# Altium PCB enviromentstation.PcbDoc
Units mil, origin at the board's own origin, x right, y up, seen from the top; angles counter-clockwise.
Board outline 2870.03 x 2225.03 mil, 2 copper layers (Top Layer, Bottom Layer); 60 components, 34 nets, 206 pads, 27 vias.
Unrouted connection lines stored in the file: 4.
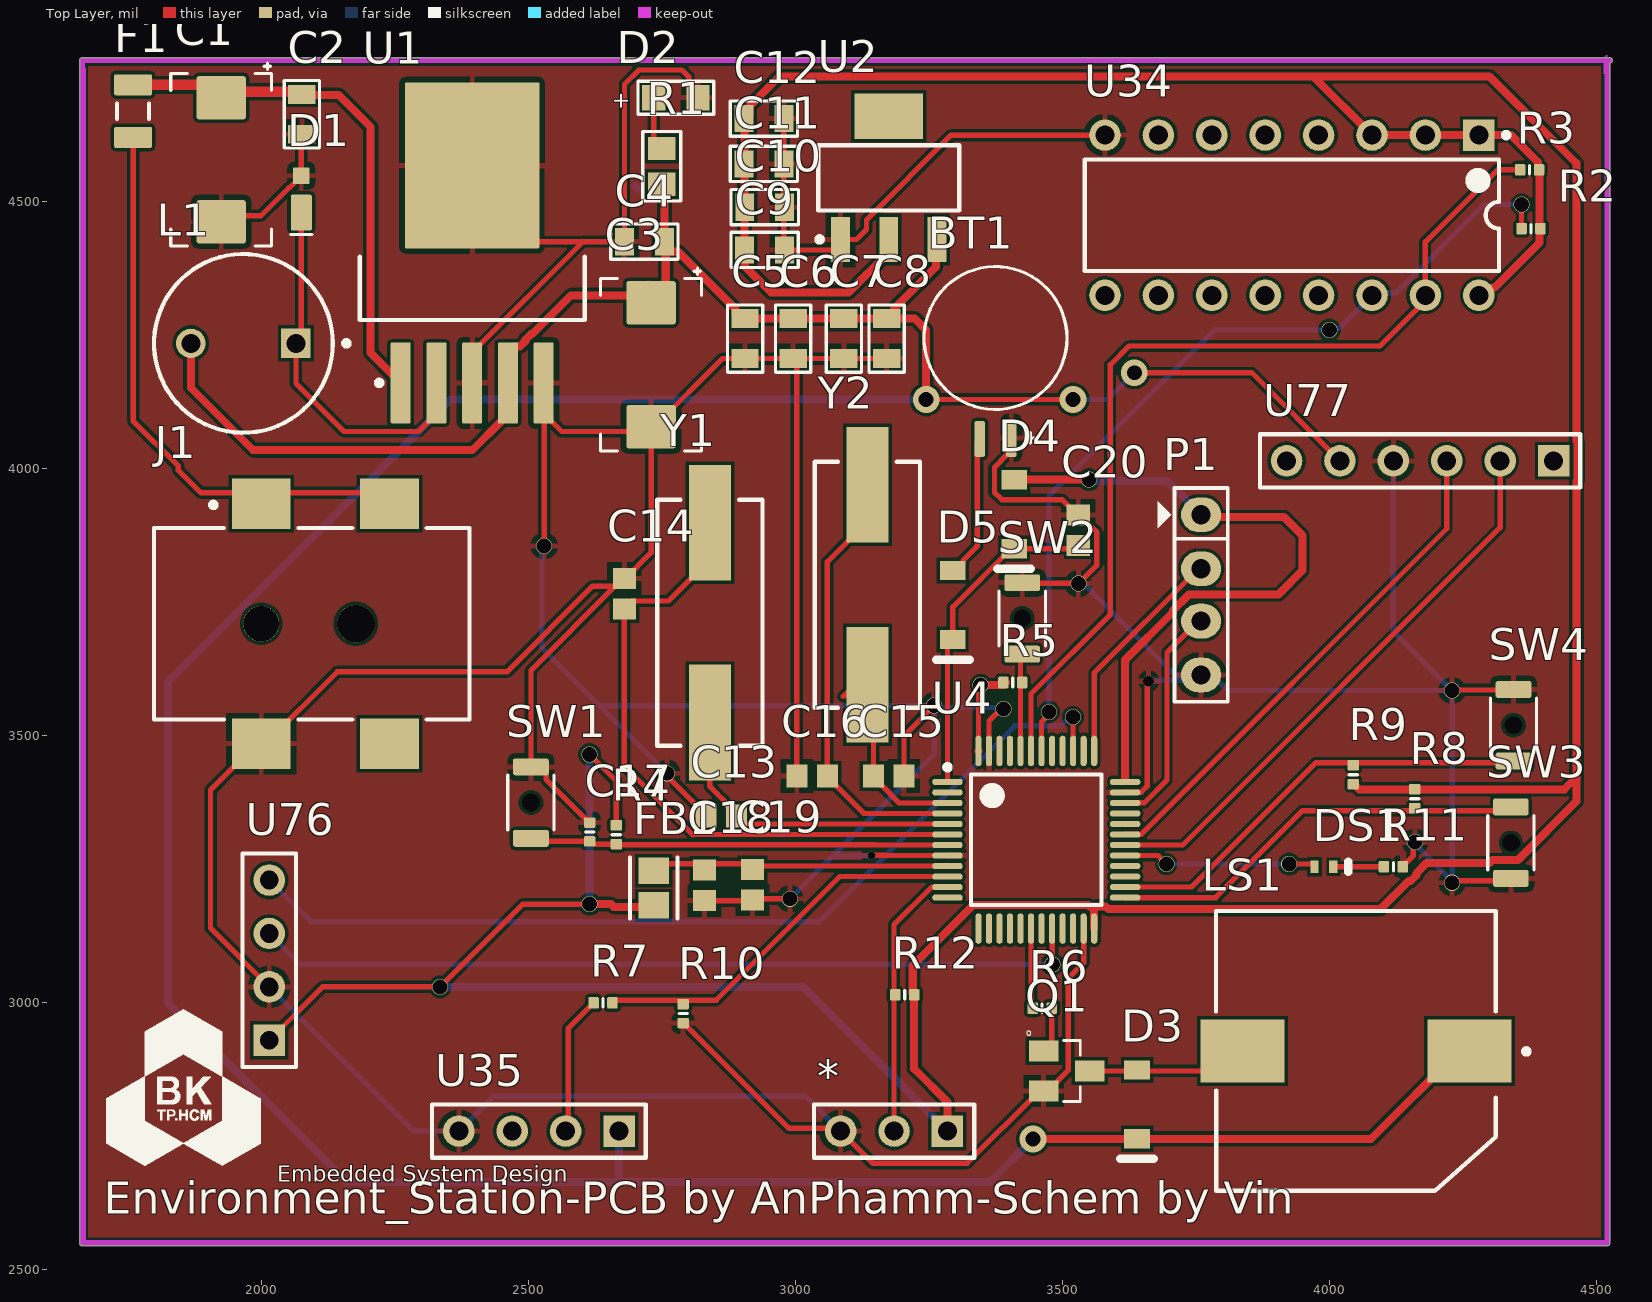
[diagram p0: Top Layer view]
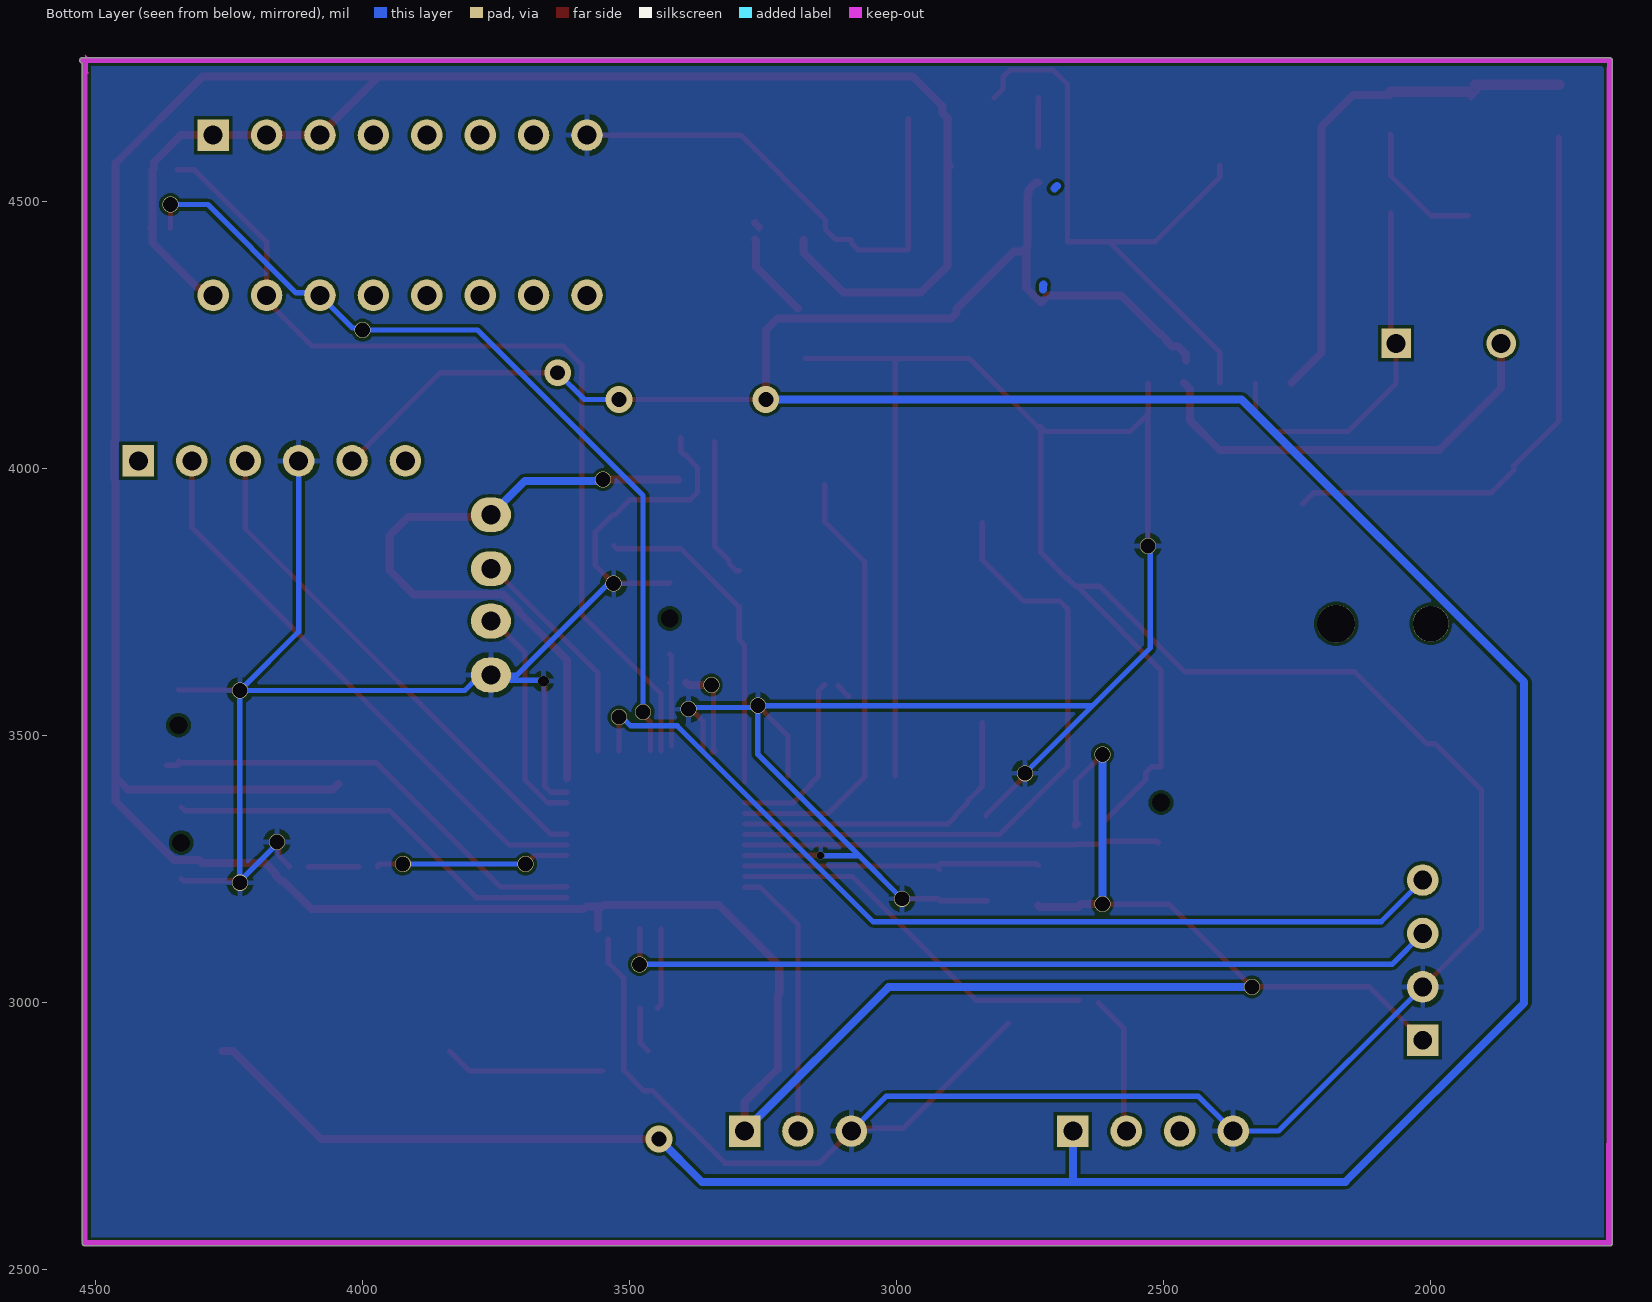
[diagram p1: Bottom Layer view, seen from below]
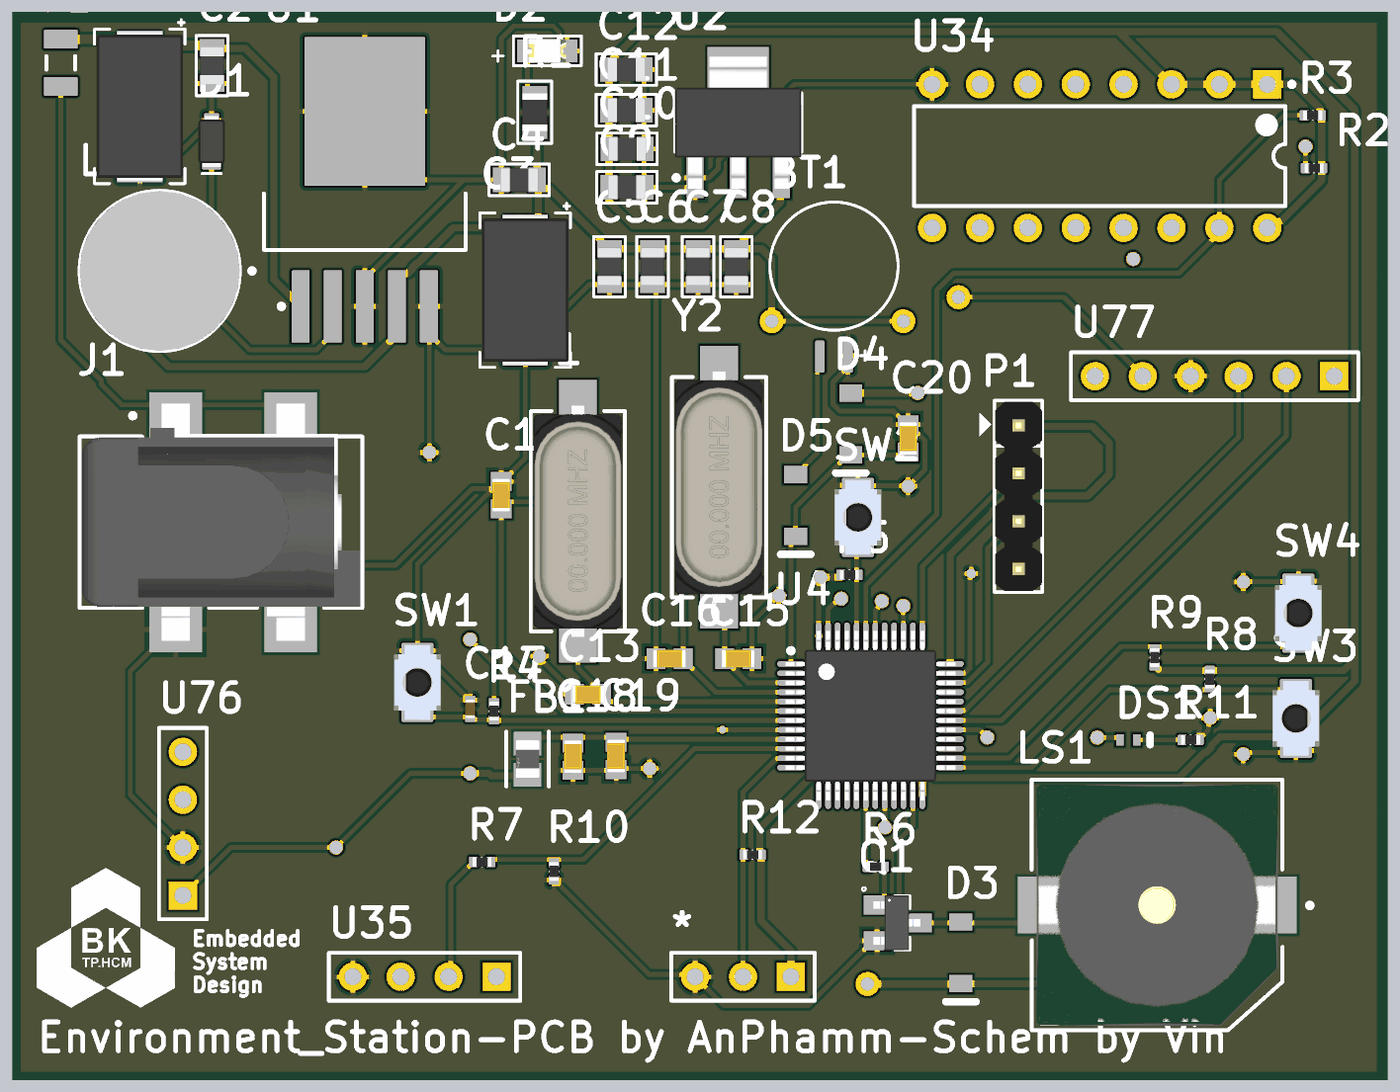
[diagram p2: 3D render of the assembled board from above, using the file's embedded part models]

## Layer stack, top to bottom
Top Solder: solder mask 0.4, Solder Resist, Dk 3.5
Top Layer: signal copper 1.4
Dielectric 1: dielectric 12.6, FR-4, Dk 4.8
Bottom Layer: signal copper 1.4
Bottom Solder: solder mask 0.4, Solder Resist, Dk 3.5

## Board outline
1659.98,2550 1659.98,4765 cw(c1665,4765) 1665,4770.02 4525,4770.02 cw(c4525,4765) 4530.02,4765 cw(c4525,4765) 4525.02,4759.98 4525.02,2550 cw(c4520,2550) 4520,2544.99 1665,2544.99 cw(c1665,2550)
cut-out: 4515,4740 4515,4770 4520,4775
cut-out: 1665,4755 1670,4750 1670,2555 4525,2555 4525,4765 4525,2555 1670,2555

## Design rules (kind name [scope] priority, off if disabled: settings)
Clearance [All] p1: gap=6 ignorepadtopadclearanceinfootprint=FALSE
PolygonConnect [All] p1: connectstyle=Relief reliefconductorwidth=10 reliefentries=4 polygonreliefangle="90 Angle" airgapwidth=10
RoutingVias [All] p1: holewidth=28 width=50 viastyle="Through Hole" minholewidth=28 minwidth=50 maxholewidth=28 maxwidth=50
SolderMaskExpansion [All] p1: expansion=4 istentingtop=FALSE
Width [All] p1: maxlimit=10 minlimit=10 preferedwidth=10
30 further rules are at their usual default settings.

## Components (designator, comment, footprint, x,y, rotation, side; value= is the part's Value field where it differs from the comment)
* "DHT11" HDR1X3 3285,2760 r180 top
BT1 "+3.3V" SEIK-MS621FE-FL11E-2_V 3375,4245 r270 top
C1 "Capacitor 330µF +/-20% 6.3V D3" PNSC-6TPF220M5L 1925,4578.86 r270 top value=330µF
C2 "1 uF, 16 VDC" CAP_0805 2075,4665 r90 top
C3 "Capacitor 330µF +/-20% 6.3V D3" PNSC-6TPF220M5L 2730,4195 r270 top value=330µF
C4 "1 uF, 16 VDC" CAP_0805 2718.64,4426.36 r0 top
C5 "4.7 uF, 25 VDC" CAP_0805 2905,4245 r90 top
C6 "2.2 uF, 35 VDC" CAP_0805 2995,4245 r90 top
C7 "1 uF, 25 VDC" CAP_0805 3090,4245 r90 top
C8 "100 nF, 50 VDC" CAP_0805 3170,4245 r90 top value="0.1 nF, 50 VDC"
C9 "4.7 uF, 25 VDC" CAP_0805 2941.6,4409 r180 top
C10 "2.2 uF, 35 VDC" CAP_0805 2941.8,4489 r180 top
C11 "1 uF, 25 VDC" CAP_0805 2940.2,4570 r180 top
C12 "100 nF, 50 VDC" CAP_0805 2940.2,4655 r180 top value="0.1 nF, 50 VDC"
C13 "Capacitor 1uF +/- 10% 16V 0603" CAPC1608X90X35ML15T15 2861.46,3350 r0 top value=12pF
C14 "Capacitor 1uF +/- 10% 16V 0603" CAPC1608X90X35ML15T15 2680,3766.46 r270 top value=12pF
C15 "Capacitor 1uF +/- 10% 16V 0603" CAPC1608X90X35ML15T15 3175,3425 r180 top value=10pF
C16 "Capacitor 1uF +/- 10% 16V 0603" CAPC1608X90X35ML15T15 3031.46,3425 r0 top value=10pF
C17 "Capacitor 100nF +/-20% 10V 0402" CAPC0402(1005)60_L 2615,3320 r270 top value=100nF
C18 "Capacitor 1uF +/- 10% 16V 0603" CAPC1608X90X35ML15T15 2830,3220 r90 top value=100nF
C19 "Capacitor 1uF +/- 10% 16V 0603" CAPC1608X90X35ML15T15 2920,3221.46 r90 top value=1µF
C20 "Capacitor 1uF +/- 10% 16V 0603" CAPC1608X90X35ML15T15 3530,3885 r270 top value=0.1uF
D1 "MSS1P4-M3/89A" "MicroSMP (DO-219AD)" 2075,4505.59 r90 top
D2 "Green, 3.2V" WL-SMCW_0805 2776.34,4695 r180 top
D3 "B5819W" MCC-SOD123_V 3640,2810 r270 top
D4 "B5819W" MCC-SOD123_V 3410,3915 r270 top
D5 "B5819W" MCC-SOD123_V 3295,3745 r270 top
DS1 "LED RED" EVRL-0402-2_V 3990,3255 r0 top
F1 "FUSE-7A/24V-6" LFUS-466_V 1760,4670 r90 top
FB1 "600Ω @100MHz" FP-BLM21-0_2-t0_85-e0_5-IPC_B 2735,3215 r270 top
J1 "PJ-002BH-SMT-TR" FP-PJ-002BH-SMT-TR-MFG 2094.49,3710 r0 top
L1 "RL622-101K-RC" INDR62-500-1100X850X1100 1966.57,4235 r180 top value=100µH
LS1 "Buzzer" FP-CT-1205CL-SMT-TR-MFG 4050,2910 r0 top
P1 "STLINK Header" JP4 3760,3814 r270 top
Q1 "MMBT2222A" MMBT-SOT23 3508.31,2872.6 r270 top
R1 "10 KOhm, 1/8 W" RESISTOR_0805 2750,4566.54 r270 top
R2 "10KR2F" RESC0402(1005)_L 4377.72,4450 r0 top value=4.7k
R3 "10KR2F" RESC0402(1005)_L 4375,4560 r0 top value=4.7k
R4 "10KR2F" RESC0402(1005)_L 2665,3315 r90 top value=10k
R5 "10KR2F" RESC0402(1005)_L 3407.28,3600 r180 top value=10k
R6 "10KR2F" RESC0402(1005)_L 3462.28,2990 r180 top value=1k
R7 "10KR2F" RESC0402(1005)_L 2640,3000 r180 top value=10k
R8 "10KR2F" RESC0402(1005)_L 4160,3382.28 r90 top value=10k
R9 "10KR2F" RESC0402(1005)_L 4045,3427.28 r270 top value=10k
R10 "10KR2F" RESC0402(1005)_L 2790,2980 r90 top value=20k
R11 "10KR2F" RESC0402(1005)_L 4120,3255 r180 top value=330
R12 "10KR2F" RESC0402(1005)_L 3205,3015 r180 top value=4.7k
SW1 "B3U-1000P-B" OMRON-B3U-1000P-2-B_V 2505,3375 r90 top
SW2 "B3U-1000P-B" OMRON-B3U-1000P-2-B_V 3425,3720 r90 top
SW3 "B3U-1000P-B" OMRON-B3U-1000P-2-B_V 4340,3300 r270 top
SW4 "B3U-1000P-B" OMRON-B3U-1000P-2-B_V 4345,3520 r90 top
U1 "LM2596SX-ADJ/NOPB" KTT0005B_L 2395,4405 r90 top
U2 "3.3V, 1A" "AMS1117-3.3V SOT223" 3175,4545 r90 top
U4 "STM32F103C8T6" STM32F103C8T6 3451.34,3305.47 r0 top
U34 "PCF8574N" N0016A 3930,4475 r270 top
U35 "MQ-2" HDR1X4 2670,2760 r180 top
U76 "UART_DEBUG" HDR1X4 2015,2930 r90 top
U77 "HC-05" HDR1X6 4420,4015 r180 top
Y1 "8MHz 6pF" FOX-HC49SDLF_V 2840,3712.01 r90 top
Y2 "32.768kHz 6pF" FOX-HC49SDLF_V 3135,3782.99 r90 top

## Footprints (in the part's own frame and the unit in brackets; to place one, negate y for a bottom-side part, rotate by r counter-clockwise, add the part's x,y. Pads: shape width x height; smd on the part's side, far side on the other; paste and mask are expansions set on the pad)
"AMS1117-3.3V SOT223" [mm] "SOT223, 4-Leads, Body 6.51x7.00mm, Pitch 2.29mm"
  rect 2.15x0.9 smd: 1(-2.93,2.29) 2(-2.93,0) 3(-2.93,-2.29)
  rect 2.15x3.25 smd: 4(2.93,0)
  silkscreen extent -3.05,-3.35 1.55,3.41, body extent -3.5,-3.35 3.5,3.35, height 1.8
CAP_0805 [mm]
  rect 0.9x1.3 smd: 1(-0.975,-0.025) 2(0.925,-0.025)
  silkscreen extent -1.63,-0.86 1.57,0.81, body extent -1.03,-0.65 0.97,0.6, height 0.6
CAPC0402(1005)60_L [mm] "Chip Capacitor, Body 1.0x0.5mm, Height 0.6mm, IPC High Density"
  rrect25% 0.5x0.55 smd: 1(-0.45,0) 2(0.45,0)
  silkscreen extent 0,-0.2 0,0.2, body extent -0.5,-0.25 0.5,0.25, height 0.6
CAPC1608X90X35ML15T15 [mm] "Chip Capacitor, 2-Leads, Body 1.75x0.95mm, IPC Low Density"
  rect 1x1.1 smd: 1(-0.725,0) 2(0.725,0)
  body extent -0.87,-0.48 0.87,0.48, height 0.9
EVRL-0402-2_V [mm] "SMD, 2-Leads, Body 1x0.5mm"
  rect 0.4x0.6 smd: 1(-0.45,0) 2(0.45,0)
  silkscreen extent 1.15,-0.25 1.15,0.25, body extent -0.5,-0.25 0.5,0.25, height 0.25
FOX-HC49SDLF_V [mm] "SMD, 2-Leads, Body 5x11.7mm"
  rect 5.5x2 smd: 1(-4.75,0) 2(4.75,0)
  silkscreen extent -5.85,-2.5 5.85,2.5, body extent -6.15,-2.35 6.15,2.35, height 4.34
FP-BLM21-0_2-t0_85-e0_5-IPC_B [mil]
  rect 49.41x57.33 smd paste+0 mask+0: 1(-32.51,0) 2(32.51,0)
  silkscreen extent -57,-44 57,44, body extent -67,-39 67,39, height 10
FP-CT-1205CL-SMT-TR-MFG [mm]
  rect 4x3 smd paste+0 mask+0: 1(5.4,0) 2(-5.4,0)
  silkscreen extent -6.66,-6.65 8.23,6.65, body extent -7.5,-6.75 7.5,6.75, height 0.25
FP-PJ-002BH-SMT-TR-MFG [mm]
  rect 2.8x2.4 smd paste+0 mask+0: 1(-2.4,5.7) 1(3.7,5.7) 2(-2.4,-5.7) 3(3.7,-5.7)
  round 1.7 hole 1.7 unplated paste-2539.97 mask+0: ""(-2.4,0)
  round 1.8 hole 1.8 unplated paste-2539.97 mask+0: ""(2.1,0)
  silkscreen extent -7.5,-4.55 7.5,5.77, body extent -7.6,-7 7.6,7, height 0.25
HDR1X3 [mm] "Connector; Header; 3 Position"
  rect 1.5x1.5 hole 0.9: 1(0,0)
  round 1.5 hole 0.9: 2(2.54,0) 3(5.08,0)
  silkscreen extent -1.27,-1.27 6.35,1.27
HDR1X4 [mm] "Connector; Header; 4 Position"
  rect 1.5x1.5 hole 0.9: 1(0,0)
  round 1.5 hole 0.9: 2(2.54,0) 3(5.08,0) 4(7.62,0)
  silkscreen extent -1.27,-1.27 8.89,1.27
HDR1X6 [mm] "Connector; Header; 6 Position"
  rect 1.5x1.5 hole 0.9: 1(0,0)
  round 1.5 hole 0.9: 2(2.54,0) 3(5.08,0) 4(7.62,0) 5(10.16,0) 6(12.7,0)
  silkscreen extent -1.27,-1.27 13.97,1.27
INDR62-500-1100X850X1100 [mm] "THD, 2-Leads, Dia 8.5mm, Pitch 5mm"
  rect 1.4x1.4 hole 0.9: 1(-2.5,0)
  round 1.4 hole 0.9: 2(2.5,0)
  silkscreen extent -5.03,-4.25 4.25,4.25, body extent -4.25,-4.25 4.25,4.25, height 11
JP4 [mil] "Jumper 4"
  oval 65x75 hole 36: 1(-100,0) 2(1,0) 3(99,0) 4(200,0)
  silkscreen extent -150,-81 250,50, body extent -148,-48 248,50, height 323
KTT0005B_L [mm] "DPAK, 5-Leads, Body 10.65x9.65mm, Pitch 1.7mm, IPC High Density"
  rrect11% 3.85x0.95 smd: 1(-6.2,3.4) 2(-6.2,1.7) 3(-6.2,0) 4(-6.2,-1.7) 5(-6.2,-3.4)
  rrect2% 7.9x6.4 smd: 6(4.15,0)
  silkscreen extent -6.32,-5.35 -0.2,5.35, body extent -3.2,-5.32 6.45,5.33, height 4.83
LFUS-466_V [mm] "SMD, 2-Leads, Body 3.175x1.524mm"
  rrect15% 1x1.8 smd: 1(-1.25,0) 2(1.25,0)
  silkscreen extent -0.36,-0.76 0.36,0.76, body extent -1.59,-0.76 1.59,0.76, height 0.66
MCC-SOD123_V [mil] "SOD123, 2-Leads, Body 2.7x1.6mm, Height 1.35mm"
  rect 35.98x47.99 smd: 1(-64.5,0) 2(64.5,0)
  silkscreen extent 102,-31 102,31, body extent -53,-31 53,31, height 53
"MicroSMP (DO-219AD)" [mm] "SOD, 2-Leads, Body 2.3x1.4mm"
  rrect15% 1.7x1 smd: 1(-0.65,0)
  rrect20% 0.8x0.8 smd: 2(1.1,0)
  silkscreen extent -1.7,-0.5 -1.7,0.5, body extent -1.35,-0.7 1.35,0.7, height 0.73
MMBT-SOT23 [mm]
  rect 1x1.4 smd: 1(-0.95,-1.1) 2(0,1.1) 3(0.95,-1.1)
  silkscreen extent -1.9,-1.9 1.45,0.65, body extent -1.45,-1.3 1.45,1.2, height 1.1
N0016A [mm] "DIP, 16-Leads, Body 19.7x6.6mm, Pitch 2.54mm"
  rect 1.5x1.5 hole 0.9: 1(-3.81,8.89)
  round 1.5 hole 0.9: 2(-3.81,6.35) 3(-3.81,3.81) 4(-3.81,1.27) 5(-3.81,-1.27) 6(-3.81,-3.81) 7(-3.81,-6.35) 8(-3.81,-8.89) 9(3.81,-8.89) 10(3.81,-6.35) 11(3.81,-3.81) 12(3.81,-1.27) 13(3.81,1.27) 14(3.81,3.81) 15(3.81,6.35) 16(3.81,8.89)
  silkscreen extent -3.93,-9.85 2.65,10.32, body extent -3.95,-9.85 3.95,9.85, height 5.08
OMRON-B3U-1000P-2-B_V [mm] "SMT, 2-Leads, Body 3x2.5mm"
  rrect25% 0.8x1.7 smd: 1(-1.7,0) 2(1.7,0)
  round 0 hole 0.85 unplated: H1(0,0)
  silkscreen extent -1.3,-1.1 1.3,1.1, body extent -2,-1.25 2,1.25, height 1.6
PNSC-6TPF220M5L [mm] "Molded Capacitor, 2-Leads, Body 7.60x4.60mm, IPC High Density"
  rrect10% 2.05x2.35 smd: 1(-2.95,0) 2(2.95,0)
  silkscreen extent -4.6,-2.4 4.1,2.4, body extent -4.02,-2.3 4.02,2.3, height 3
RESC0402(1005)_L [mm] "Chip Resistor, Body 1.0x0.5mm, IPC High Density"
  rrect25% 0.5x0.55 smd: 1(-0.45,0) 2(0.45,0)
  silkscreen extent 0,-0.2 0,0.2, body extent -0.5,-0.25 0.5,0.25, height 0.3
RESISTOR_0805 [mm] "Chip Resistor, 2-Leads, Body 2,00x1,20mm, IPC Medium Density"
  rect 1.1x1.3 smd: 1(-0.85,0) 2(0.85,0)
  silkscreen extent -1.65,-0.9 1.65,0.9, body extent -1,-0.65 1,0.65, height 0.45
SEIK-MS621FE-FL11E-2_V [mm] "SMD, 2-Leads, Diameter 6.8mm"
  rrect35% 1.8x0.5 smd: 1(4.75,0.75)
  rrect35% 1.7x0.5 smd: 2(4.8,-0.75)
  silkscreen extent -3.4,-3.4 5,3.4, body extent -3.4,-3.4 4.35,3.4, height 2.7
STM32F103C8T6 [mm] "TSQFP, 48-Leads, Body 7.00x7.00mm, Pitch 0.50mm, IPC Medium Density"
  oval 1.45x0.3 smd: 1(-4.225,2.75) 2(-4.225,2.25) 3(-4.225,1.75) 4(-4.225,1.25) 5(-4.225,0.75) 6(-4.225,0.25) 7(-4.225,-0.25) 8(-4.225,-0.75) 9(-4.225,-1.25) 10(-4.225,-1.75) 11(-4.225,-2.25) 12(-4.225,-2.75) 25(4.225,-2.75) 26(4.225,-2.25) 27(4.225,-1.75) 28(4.225,-1.25) 29(4.225,-0.75) 30(4.225,-0.25) 31(4.225,0.25) 32(4.225,0.75) 33(4.225,1.25) 34(4.225,1.75) 35(4.225,2.25) 36(4.225,2.75)
  oval 0.3x1.45 smd: 13(-2.75,-4.225) 14(-2.25,-4.225) 15(-1.75,-4.225) 16(-1.25,-4.225) 17(-0.75,-4.225) 18(-0.25,-4.225) 19(0.25,-4.225) 20(0.75,-4.225) 21(1.25,-4.225) 22(1.75,-4.225) 23(2.25,-4.225) 24(2.75,-4.225) 37(2.75,4.225) 38(2.25,4.225) 39(1.75,4.225) 40(1.25,4.225) 41(0.75,4.225) 42(0.25,4.225) 43(-0.25,4.225) 44(-0.75,4.225) 45(-1.25,4.225) 46(-1.75,4.225) 47(-2.25,4.225) 48(-2.75,4.225)
  silkscreen extent -4.35,-3.1 3.1,3.57, body extent -4.5,-4.5 4.5,4.5, height 1.6
WL-SMCW_0805 [mm] "SMD Mono-color Chip LED, body 2.0x1.25mm"
  rect 1.1x1.2 smd: 1(-1.05,0) 2(1.05,0)
  silkscreen extent -1.8,-0.79 1.8,0.79, body extent -1,-0.63 1,0.62, height 0.7

## Part data
*: library part CMP-00002-1, "vinh"
BT1: library part CMP-00029-00000-1, "MS Lihium Rechargeable Battery, 3 V, -20 to 60 degC, Tray", Mounting Technology=WithLeads, Pins=2, RoHS Compliant=NotApplicable
C1 C3: library part CMP-001-00058-3, "Molded Tantalum Polymer Capacitor, 330 uF, +/- 20%, 6.3 V, -55 to 105 degC, 2-Pin SMD, RoHS, Tape and Reel", Case/Package=1210, Max Operating Temperature=105°C, Min Operating Temperature=-55°C, Tolerance=20%, Voltage Rating=6.3V, Mounting Technology=SMT, Pins=2
C2 C4: library part 0108051051016, "CAP, size 0805, 1 uF, 16 VDC", Capacitance="1 uF", Manufacture Name=TDK, Manufacture SN=CGA4J2X7R1C105K125AA, Operating Temperature="-55 to +125degC", Tolerance=+/-10%, Voltage Rating DC="16 VDC", ComponentLink2Description=Datasheet, ComponentLink2URL=https://product.tdk.com/system/files/dam/doc/product/capacitor/ceramic/mlcc/catalog/mlcc_automotive_general_en.pdf?ref_disty=mouser, Mounting Technology=SMT, Packaging="Tape and Reel", Size=0805, Supplier 1 Name=Mouser, Supplier 1 SN=810-CGA4J2X7R1C105K, Supplier 1 URL=https://www.mouser.vn/ProductDetail/TDK/CGA4J2X7R1C105K125AA?qs=NRhsANhppD8sFjo%252B1TQuCQ%3D%3D&utm_source=mouser-refine-download&utm_medium=file&utm_campaign=CGA4J2X7R1C105K125AA&utm_content=TDK, Supplier 2 Name=Digi-Key, Supplier 2 SN=445-5689-2-ND, Supplier 2 URL=https://www.digikey.com/en/products/detail/tdk-corporation/cga4j2x7r1c105k125aa/2443167, Supplier 3 Name=thegioiic, Supplier 3 SN=OEM, Supplier 3 URL=N/A
C5 C9: library part 0108054751025, "CAP, size 0805, 4.7 uF, 25 VDC", Capacitance="4.7 uF", Manufacture Name=TDK, Manufacture SN=CGA4J1X8L1E475K125AC, Operating Temperature="-55 to +125degC", Tolerance=+/-10%, Voltage Rating DC="25 VDC", ComponentLink2Description=Datasheet, ComponentLink2URL=https://product.tdk.com/system/files/dam/doc/product/capacitor/ceramic/mlcc/catalog/mlcc_automotive_hightemp_en.pdf?ref_disty=mouser, Mounting Technology=SMT, Packaging="Tape and Reel", Size=0805, Supplier 1 Name=Mouser, Supplier 1 SN=810-CGA4J1X8L1E125AC, Supplier 1 URL=https://www.mouser.vn/ProductDetail/TDK/CGA4J1X8L1E475K125AC?qs=gZXFycFWdANxpKJOMQuJTA%3D%3D&utm_source=mouser-refine-download&utm_medium=file&utm_campaign=CGA4J1X8L1E475K125AC&utm_content=TDK, Supplier 2 Name=Digi-Key, Supplier 2 SN=445-181605-2-ND, Supplier 2 URL=https://www.digikey.com/en/products/detail/tdk-corporation/cga4j1x8l1e475k125ac/9991390, Supplier 3 Name=thegioiic, Supplier 3 SN=OEM, Supplier 3 URL=N/A
C6 C10: library part 0108052251035, "CAP, size 0805, 2.2 uF, 35 VDC", Capacitance="2.2 uF", Manufacture Name=TDK, Manufacture SN=CGA4J1X7R1V225K125AC, Operating Temperature="-55 to +125degC", Tolerance=+/-10%, Voltage Rating DC="35 VDC", ComponentLink2Description=Datasheet, ComponentLink2URL=https://product.tdk.com/system/files/dam/doc/product/capacitor/ceramic/mlcc/catalog/mlcc_automotive_general_en.pdf?ref_disty=mouser, Mounting Technology=SMT, Packaging="Tape and Reel", Size=0805, Supplier 1 Name=Mouser, Supplier 1 SN=810-CGA4J1X7R1V225K, Supplier 1 URL=https://www.mouser.vn/ProductDetail/TDK/CGA4J1X7R1V225K125AC?qs=NRhsANhppD%2FTd0jz18r29g%3D%3D&utm_source=mouser-refine-download&utm_medium=file&utm_campaign=CGA4J1X7R1V225K125AC&utm_content=TDK, Supplier 2 Name=Digi-Key, Supplier 2 SN=445-6963-2-ND, Supplier 2 URL=https://www.digikey.com/en/products/detail/tdk-corporation/cga4j1x7r1v225k125ac/2672856, Supplier 3 Name=thegioiic, Supplier 3 SN=OEM, Supplier 3 URL=N/A
C7 C11: library part 0108051051025, "CAP, size 0805, 1 uF, 25 VDC", Capacitance="1 uF", Manufacture Name=TDK, Manufacture SN=CGA4J1X8R1E105K125AE, Operating Temperature="-55 to +125degC", Tolerance=+/-10%, Voltage Rating DC="25 VDC", ComponentLink2Description=Datasheet, ComponentLink2URL=https://product.tdk.com/system/files/dam/doc/product/capacitor/ceramic/mlcc/catalog/mlcc_automotive_soft_en.pdf?ref_disty=mouser, Mounting Technology=SMT, Packaging="Tape and Reel", Size=0805, Supplier 1 Name=Mouser, Supplier 1 SN=810-A4J1X815K125AE, Supplier 1 URL=https://www.mouser.vn/ProductDetail/TDK/CGA4J1X8R1E105K125AE?qs=Ii670aiJhr6VRhkBsruYJg%3D%3D&utm_source=mouser-refine-download&utm_medium=file&utm_campaign=CGA4J1X8R1E105K125AE&utm_content=TDK, Supplier 2 Name=Digi-Key, Supplier 2 SN=445-174807-2-ND, Supplier 2 URL=https://www.digikey.com/en/products/detail/tdk-corporation/cga4j1x8r1e105k125ae/6556490, Supplier 3 Name=thegioiic, Supplier 3 SN=OEM, Supplier 3 URL=N/A
C8 C12: library part 0108051041050, "CAP, size 0805, 100 nF, 50 VDC", Capacitance="0.1 nF", Manufacture Name=TDK, Manufacture SN=CGA4J2X8R1H104K125AD, Operating Temperature="-55 to +125degC", Tolerance=+/-10%, Voltage Rating DC="50 VDC", ComponentLink2Description=Datasheet, ComponentLink2URL=https://product.tdk.com/system/files/dam/doc/product/capacitor/ceramic/mlcc/catalog/mlcc_automotive_epoxy_en.pdf?ref_disty=mouser, Mounting Technology=SMT, Packaging="Tape and Reel", Size=0805, Supplier 1 Name=Mouser, Supplier 1 SN=810-C2012X8R1H104KEP, Supplier 1 URL=https://www.mouser.vn/ProductDetail/TDK/CGA4J2X8R1H104K125AD?qs=LcTL%2F5vFEzExqZqv3rh1qQ%3D%3D&utm_source=mouser-refine-download&utm_medium=file&utm_campaign=CGA4J2X8R1H104K125AD&utm_content=TDK, Supplier 2 Name=Digi-Key, Supplier 2 SN=445-8810-2-ND, Supplier 2 URL=https://www.digikey.com/en/products/detail/tdk-corporation/cga4j2x8r1h104k125ad/3248169, Supplier 3 Name=thegioiic, Supplier 3 SN=OEM, Supplier 3 URL=N/A
C13 C14 C15 C16 C18 C19 C20: library part CMP-001-00004-6, "Chip Capacitor, 1 uF, +/- 10%, 16 V, 0603 (1608 Metric)", Capacitor Type=Ceramic, Case/Package=0603, Max Operating Temperature=125°C, Min Operating Temperature=-55°C, Tolerance=10%, Voltage Rating=16V, Mounting Technology=SM, Pins=2, RoHS Compliant=True
C17: library part CMP-001-00061-3, "Chip Capacitor, 100nF +/-20%, 10V, 0402, Thickness 0.6 mm", Case/Package=0402, Max Operating Temperature=85°C, Min Operating Temperature=-55°C, Tolerance=20%, Voltage Rating=10V, Mounting Technology=SMT, Pins=2
D1: library part CMP-004-00024-3, "Schottky Diodes & Rectifiers 1.0 Amp 40 Volt", Forward Voltage=460mV, Max Operating Temperature=150°C, Max Surge Current=25A, Min Operating Temperature=-55°C, Mounting Technology=SMT, Pins=2
D2: library part 160805GreenBlur, "WL-SMCW SMT Mono-color Chip LED Blur, size 0805, Green, 3.2V, 140deg", Color=Green, ComponentLink1Description="Datasheet link", ComponentLink1URL=N/A, ComponentLink2Description="Supplier 1 URL", ComponentLink2URL=https://www.mouser.vn/ProductDetail/Broadcom-Avago/HSMG-C170?qs=YDL0qNrpDT4lm8ArMPkMEA%3D%3D, ComponentLink3Description="Supplier 2 URL", ComponentLink3URL="SML-LXT0805GW-TR Lumex Opto/Components Inc. | Optoelectronics | DigiKey", ComponentLink4Description="Supplier 3 URL", ComponentLink4URL=N/A, Size=0603, Supplier 1 Name=Mouser, Supplier 1 SN=630-HSMG-C170, Supplier 1 URL=https://www.mouser.vn/ProductDetail/Broadcom-Avago/HSMG-C170?qs=YDL0qNrpDT4lm8ArMPkMEA%3D%3D, Supplier 2 Name=Digi-Key, Supplier 2 SN=67-1553-2-ND, Supplier 2 URL="SML-LXT0805GW-TR Lumex Opto/Components Inc. | Optoelectronics | DigiKey", Supplier 3 Name=ICDayRoi, Supplier 3 SN=N/A, Supplier 3 URL=N/A, Type=Blur
D3 D4 D5: library part CMP-004-00005-2, "Schottky Barrier Rectifier, 40 V, 1 A, -65 to 125 degC, 2-Pin SOD123, RoHS, Tape and Reel", Case/Package=SOD123, Manufacturer="Micro Commercial Components", Package Description="2-Pin Small Outline Diode, Body 2.7 x 1.6 mm, Height 1.35 mm", Datasheet URL=http://www.mccsemi.com/up_pdf/B5817W-B5819W(SOD-123).pdf, Datasheet Version="Rev. B, 01/2013", Manufacturer URL=http://www.mccsemi.com/, Mounting Technology=SM, Package Reference=SOD123, Package URL=http://www.mccsemi.com/up_pdf/1N4448W(SOD-123).pdf, RoHS Compliant=Unknown
DS1: library part CMP-007-00000-2, "Chip LED, White, 5 V, 10 mA, 30 mW, -40 to 85 degC, 2-Pin SMD (0402), RoHS, Tape and Reel", Case/Package=0402, Forward Current=5mA, Forward Voltage=2.6V, Illumination Colour=White, Manufacturer="Everlight Electronics", Max Operating Temperature=85°C, Min Operating Temperature=-40°C, Package Description="2-Pin Surface Mount Device, Body 1 x 0.5 mm", Package Quantity=3000, Power=30mW, Datasheet URL=http://www.everlight.com/file/ProductFile/16-219A-T2D-AR2T1QY-3T.pdf, Datasheet Version="Rev. 5, 04/2013", Luminous Intensity=360mcd, Manufacturer URL=http://www.everlight.com/, Mounting Technology=SM, Package Reference=0402, Packaging=TapeandReel, RoHS Compliant=True, Viewing Angle=130degrees
F1: library part CMP-005-00010-2, "Surface Mount Fuses 7A 24V VFA SLIMLINE", Current Rating=7A, Pins=2
FB1: library part CMP-06046-002585-1, "Chip Ferrite Bead, 0805, 150Ω @ 100MHz, 0.21Ω, 25%, 600mA"
J1: library part CMP-2000-06897-2, "CONN PWR JACK 2.5X5.5MM SOLDER", Current Rating=5A, Manufacturer="CUI Inc", Package=0, Temperature="-25°C to +85°C", Temperature Range High=+85°C, Temperature Range Low=-25°C, Voltage Rating=24V, Automotive=No, Category=Conn, ComponentLink2Description=Datasheet, ComponentLink2URL=https://www.cuidevices.com/product/resource/digikeypdf/pj-002bh-smt-tr.pdf, Conn Gender=Male, Conn Orientation="Right Angle", Contact Material=Nickel,Silver, Device Class L1=Connectors, Device Class L2="Power Connectors", Device Class L3=unset, Digikey Description="CONN PWR JACK 2.5X5.5MM SOLDER", Height=11.43mm, Lead Free=Yes, Manufacturer Part Number=PJ-002BH-SMT-TR, Mouser Description="2.5 mm Center Pin, 5.0 A, Right Angle, Surface Mount (SMT), Dc Power Jack Connector", Number of Contacts=3, Octopart=https://octopart.com/pj-002bh-smt-tr-cui-25947151, RoHS=TRUE, Standoff Height=0.1mm
L1: library part CMP-006-00013-6, "Radial Inductor, 100 uH, +/- 10%, 0.91 A, -55 to 105 degC, 2-Pin THD, RoHS, Bulk", Case/Package=Radial, Current Rating=910mA, Inductance Tolerance=10%, Manufacturer=Bourns, Max Operating Temperature=105°C, Min Operating Temperature=-55°C, Package Description="2-Pin Radial Lead, Dia 8.5 mm, Pitch 5 mm", Package Quantity=100, Package Reference=INDR62-500-1100X850X1100, Resistance=0.28Ohm, Self Resonant Frequency=3.7MHz, Core Material=Ferrite, Datasheet URL=http://www.bourns.com/docs/Product-Datasheets/rl622_series.pdf, Datasheet Version=Aug-10, Diameter=8.5mm, Lead Pitch=5mm, Mounting Technology=TH, Packaging=Bulk, Pins=2, Q Factor=20, RoHS Compliant=True, Shielding=Unshielded, Tolerance=10%
LS1: library part CMP-00027-00002-1, "12.8 mm, 5 Vdc, 92 dB, 2.4 kHz, Surface Mount (SMT), Driving Circuit, Magnetic Audio Indicator Buzzer", Mounting Technology="Surface Mount"
P1: library part CMP-002-00100-1, "Header, 4-Pin", Component Type=Standard, Design Item ID="Header 4", LatestRevisionDate=17-Jul-2002, LatestRevisionNote="Re-released for DXP Platform.", Pins=4, Publisher="Altium Limited", Source=PIF_Schematic_Lib.SchLib
Q1: library part CMP-013-00034-1, "TRANS NPN, 40V, 600MA, SOT23-3", Case/Package=SOT-23, Current - Collector=600mA, DC Current Gain=35-300, Power Dissipation=250mW, Voltage - Collector Emitter Breakdown=40V, Component Type=Standard, Design Item ID=MMBT2222A, Gain Bandwidth Product fT=250MHz, Pins=3, Source=BJT.SchLib, Supplier 1 Name=Mouser, Supplier 1 SN=637-MMBT2222A, Supplier 1 URL=https://www.mouser.vn/ProductDetail/Diotec-Semiconductor/MMBT2222A?qs=OlC7AqGiEDl9N1c3%252BL%2F%252Brw%3D%3D, Supplier 2 Name=Digi-Key, Supplier 2 SN=2796-MMBT2222ATR-ND, Supplier 2 URL=https://www.digikey.com/en/products/detail/diotec-semiconductor/MMBT2222A/13163394, Supplier 3 Name=thegioiic, Supplier 3 SN=N/A, Supplier 3 URL=https://www.thegioiic.com/mmbt2222a-transistor-npn-40v-0-6a-3-chan-sot-23, Transistor Type=NPN
R1: library part 0008051035, "RES, size 0805, 10 KOhm, 1/8 W", Manufacture  Name="Vishay Dale", Manufacture  SN=CRCW080510K0JNEAC, Rated Power="1/8 W", Resistance="10 KOhm", Resistance Tolerance=+/-5%, ComponentLink1Description="Datasheet link", ComponentLink1URL=https://www.vishay.com/docs/28773/crcwce3.pdf, ComponentLink2Description="Supplier 1 URL", ComponentLink2URL=https://www.mouser.vn/ProductDetail/Vishay-Dale/CRCW080510K0JNEB?qs=LOX6nxTstiZ5fn9YUdHx5A%3D%3D, ComponentLink3Description="Supplier 2 URL", ComponentLink3URL=https://www.digikey.com/en/products/detail/vishay-dale/CRCW080510K0JNEAC/7928585, ComponentLink4Description="Supplier 3 URL", ComponentLink4URL=N/A, Mounting Technology=SMT, Size=0805, Supplier 1 Name=Mouser, Supplier 1 SN=71-CRCW080510K0JNEB, Supplier 1 URL=https://www.mouser.vn/ProductDetail/Vishay-Dale/CRCW080510K0JNEB?qs=LOX6nxTstiZ5fn9YUdHx5A%3D%3D, Supplier 2 Name=Digi-Key, Supplier 2 SN=541-4163-2-ND, Supplier 2 URL=https://www.digikey.com/en/products/detail/vishay-dale/CRCW080510K0JNEAC/7928585, Supplier 3 Name=Thegioiic, Supplier 3 SN=N/A, Supplier 3 URL=N/A
R2 R3 R4 R5 R6 R7 R8 R9 R10 R11 R12: library part CMP-009-00066-2, "10K 0.063W 1% 0402 (1005 Metric)  SMD", Case/Package=0402, Power=63mW, Tolerance=1%, Mounting Technology=SMT, Pins=2
SW1 SW2 SW3 SW4: library part CMP-011-00011-3, "Ultra-small Surface-mounting Tactile Switches with High Contact Reliability, SPST-NO, -25 to 70 degC, 2-Pin SMD, RoHS, Tape and Reel", Current Rating=50mA, Voltage Rating=12V, Pins=2, RoHS Compliant=Details
U1: library part CMP-2000-06545-1, "Simple Switcher(R) Power Converter 150 kHz Step-Down Voltage Regulator, 3 A, 4.5 to 40 V, -40 to 125 degC, 5-Pin TO-263 (KTT), Green (RoHS & no Sb/Br), Tape and Reel", Manufacturer="Texas Instruments", Operating Temperature Max=125°C, Operating Temperature Min=-40°C, Operating Temperature Range=-40°Cto+125°C, Output Current=3A, Output Voltage=37V, Package Description="5-Pin Plastic Flange Mount, Body 10.16 x 8.925 mm, Pitch 1.7 mm", Package Reference=KTT5, Package Version="4200577-4/G, 01/2013", PartNumber=LM2596, Primary Input Voltage=40V, Voltage Regulator Case Style=TO-263, Datasheet URL=http://www.ti.com/lit/ds/symlink/lm2596.pdf, Datasheet Version="Rev. C, 04/2013", Manufacturer URL=http://www.ti.com/, Mounting Technology=SurfaceMount, MSL=MSL3-168hours, No. of Outputs=1, No. of Pins=5, Number of Outputs=1, Package URL=http://www.ti.com/litv/pdf/mpsf007e, SVHC=NoSVHC(19-Dec-2012)
U2: library part AMS1117-3.3V, "AMS1117-3.3V, OUT 3.3V 1A.", Current Input Maximum=N/A, Current Output Maximum=1A, Manufacturer=AMS, Voltage Input Maximum=15V, Voltage Output=3.3V, ComponentLink1Description="Datasheet link", ComponentLink1URL=http://www.advanced-monolithic.com/pdf/ds1117.pdf, ComponentLink2Description="Supplier 1 URL", ComponentLink2URL=N/A, ComponentLink3Description="Supplier 2 URL", ComponentLink3URL=N/A, ComponentLink4Description="Supplier 3 URL", ComponentLink4URL=N/A, Manufacturer Part Number=N/A, Mounting Technology=SMD, Pad Count=4, Supplier 1 Name=Mouser, Supplier 1 SN=N/A, Supplier 1 URL=N/A, Supplier 2 Name=Digi-Key, Supplier 2 SN=N/A, Supplier 2 URL=N/A, Supplier 3 Name=thegioiic, Supplier 3 SN=N/A, Supplier 3 URL=https://www.thegioiic.com/ams1117-3-3v-ic-on-ap-3-3v-1a-sot-223
U4: library part CMP-031-00032-1, "ARM Microcontrollers - MCU 32BIT Cortex M3 64KB 20KB RAM 2X12 ADC", Manufacture SN=STM32F103C8T6TR, Manufacturer=STM, Component Type=Standard, ComponentLink1Description=Datasheet, ComponentLink1URL=https://www.mouser.com/datasheet/2/389/stm32f103c8-1851025.pdf, ComponentLink2Description="Supplier 1 URL", ComponentLink2URL=https://www.mouser.com/ProductDetail/STMicroelectronics/STM32F103C8T6?qs=bhCVus9SdFtq6kqxsU5%2FDA%3D%3D, ComponentLink3Description="Supplier 2 URL", ComponentLink3URL=497-17666-2-ND, ComponentLink4Description="Supplier 3 URL", ComponentLink4URL=https://www.thegioiic.com/stm32f103c8t6-32-bit-arm-cortex-m3-microcontroller-72mhz-64kb-flash-48-lqfp, Design Item ID=STM32F103C8T6, Footprint name=LQFP48, Pad Count=48, Part Number=STM32F103C8T6, Pins=48, Source=STM32.SchLib, Supplier 1 Name=Mouser, Supplier 1 SN=511-STM32F103C8T6, Supplier 1 URL=https://www.mouser.com/ProductDetail/STMicroelectronics/STM32F103C8T6?qs=bhCVus9SdFtq6kqxsU5%2FDA%3D%3D, Supplier 2 Name=Digi-Key, Supplier 2 SN=497-17666-2-ND, Supplier 2 URL=https://www.digikey.com/en/products/detail/stmicroelectronics/stm32f103c8t6tr/2122442, Supplier 3 Name=thegioiic, Supplier 3 SN=STM32F103C8T6, Supplier 3 URL=https://www.thegioiic.com/stm32f103c8t6-32-bit-arm-cortex-m3-microcontroller-72mhz-64kb-flash-48-lqfp
U34: library part CMP-002-00117-2, "8-bit 2.5- to 5.5-V I2C/SMBus I/O expander with interrupt 16-PDIP -40 to 85", Case/Package=PDIP, Max Operating Temperature=85°C, Min Operating Temperature=-40°C, Pins=16
U35: library part CMP-00003-6, "Gas sensor", Pins=4, Sensor Type=gas
U76: library part CMP-00001-4, "USB-to-UART TTL adapter."
U77: library part CMP-00025-00003-6, "Bluetooth module with UART communication"
Y1 Y2: library part CMP-003-00004-2, "Resistance Weld Crystal, 8 MHz, +/- 30 ppm, 20 pF, -20 to 70 degC, 2-Pin SMD, RoHS, Tape and Reel", Case/Package=HC49SDLF, Frequency=8MHz, Frequency Tolerance=30ppm, Load Capacitance=20pF, Manufacturer="FOX Electronics", Max Operating Temperature=70°C, Min Operating Temperature=-20°C, Package Description="2-Pin Surface Mount Device, Body 5 x 11.7 mm", Package Quantity=1, Resistance=80Ohm, Tolerance=50ppm, Datasheet URL=http://www.foxonline.com/pdfs/hc49sdlf.pdf, Datasheet Version=Mar-15, ESR=80, Manufacturer URL=http://www.foxonline.com/, Mounting Technology=SM, Package Reference=HC49SDLF, Packaging=CutTape, Pins=2, RoHS Compliant=True

## Via types
v1: diameter 30, hole 28, Top Layer to Bottom Layer, 21 vias
v2: diameter 50, hole 28, Top Layer to Bottom Layer, 4 vias
v3: diameter 20, hole 20, Top Layer to Bottom Layer, 1 vias
v4: diameter 15, hole 15, Top Layer to Bottom Layer, 1 vias

## Nets (pads, with @x,y where several pads share a name; then routed paths per layer and width w, separated by ;. In a path a pad name is that pad's centre, name@x,y a point inside that pad or via, vN(x,y) a via of type N, cw(c..) or ccw(c..) an arc to the next point about the centre after c; other vN are vias at no path point)
+3.3V: *.1 C9.2 C10.2 C11.2 C12.2 D4.1 FB1.2 P1.1 R2.2 R3.2 R4.2 R5.2 R8.2 R9.2 R12.1 U2.2 U4.24 U4.36 U4.48 U34.1 U34.2 U34.3 U34.16 U76.1 | length 10242.7
  Top Layer w10: U76.1 2115,3030 v1(2335,3030) 2490,3185 v1(2615,3185) ; v1(2615,3465) 2665,3415 2665,3337.28 R4.2@2662.72,3335 ; U4.48 3343.07,3585.38 3347.28,3589.59 v1(3347.28,3595)
  Top Layer w15: v1(2615,3185) 2655,3185 2660,3180 2732.51,3180 FB1.2 ; R4.2@2662.72,3335 R4.2 ; C11.2@2900.2,4567.4 C11.2 ; U2.2 3175,4405.04 3099.96,4330 2955,4330 2905,4380 2905,4654.8 C12.2 2914.01,4666.22 2914.01,4679.06 2969.95,4735 3343.5,4735 ; *.1 3285,2814.39 3222.72,2876.67 R12.1 3220,3017.72 3220,3070 3333.18,3183.18 3548.79,3183.18 3551.29,3180.68 3560,3180.68 ; U4.48 U4.48@3343.42,3472.16 ; 3345,4735 3970,4735 ; v1(3347.28,3595) 3389.72,3595 3394.57,3599.84 R5.2@3394.57,3600 ; D4.1 3410.5,3980 v1(3550,3980) ; U4.24 3559.61,3180.28 3560,3180.68 ; 3617.68,3420 3617.68,3642.02 3707,3731.35 3707,3734.88 3737.12,3765 3905,3765 3950,3810 3950,3875 3915,3910 3764,3910 P1.1 ; R9.2 4045.98,3409.57 4055.55,3400 R8.2@4159.02,3400 ; R8.2 4440,3400 4462.53,3422.53 ; U34.16 4291.92,4325 4306.21,4339.29 4309.29,4339.29 4393.54,4423.54 4393.54,4448.11 R2.2 ; R2.2@4393.54,4453.33 4393.54,4560.16 4390.37,4563.33 4390.37,4574.63 4340,4625 U34.1 U34.2 U34.3 3970,4735 ; 3560,3180.68 3581.3,3180.68 3586.17,3175.8 4096.13,3175.8 4149,3228.67 4152.54,3228.67 4163.06,3239.19 4163.06,3242.73 4182.15,3261.82 4299.92,3261.82 4305.87,3267.77 4353.35,3267.77 4462.53,3376.94 4462.53,3422.53 ; 3970,4735 4300,4735 4462.53,4572.47 4462.53,4053.45 4465.03,4050.95 4465.03,3979.05 4462.53,3976.55 4462.53,3422.53
  Bottom Layer w15: v1(2335,3030) 3015,3030 *.1 ; v1(2615,3185) v1(2615,3465) ; v1(3550,3980) 3552.5,3977.5 3696.5,3977.5 P1.1
+5V: C3.1 C4.2 C5.2 C6.2 C7.2 C8.2 D3.2 L1.2 LS1.1 R1.2 U1.4 U2.3 U35.1 U77.5 | length 8162.2
  Top Layer w10: v2(3245,4130) v2(3520,4130) ; v2(3635,4180) 3855,4180 U77.5
  Top Layer w15: L1.2 1868.15,4151.85 1985,4035 2395,4035 2450.73,4090.73 2450.73,4149.7 U1.4 ; U1.4@2458.07,4203.07 2458.07,4214.13 2473.13,4229.19 2484.19,4229.19 2494.66,4239.66 2494.66,4241.91 2504.94,4252.19 2507.19,4252.19 2580,4325 2716.14,4325 C3.1 2757.46,4338.61 2757.46,4415.06 C4.2@2755.04,4417.48 ; R1.2@2735,4536.54 2738.94,4536.54 2753.09,4522.38 2753.09,4515.55 2755.04,4513.6 C4.2@2755.04,4417.48 ; 3185,4300 3263.18,4378.18 3263.18,4427.67 U2.3 ; v2(3245,4130) 3245,4260 3223.6,4281.4 C8.2 C7.2 C6.2 2898.13,4281.4 2887.91,4291.62 2887.91,4299.49 2780.13,4407.27 2765.26,4407.27 C4.2@2755.04,4417.48 ; U2.3@3257.47,4452.47 U2.3@3265,4460 ; v2(3445,2745) 3639.5,2745 D3.2 4078.41,2745.5 4242.91,2910 LS1.1
  Bottom Layer w10: v2@3525,4135 v2(3520,4130) 3585,4130 v2(3635,4180)
  Bottom Layer w15: U35.1 2670,2670 2665,2665 ; 2700,4530 2705,4525 ; 2725,4345 2725.86,4344.14 2725.86,4335.86 ; v2(3245,4130) 2354.29,4130 1825,3600.71 1825,3000 2160,2665 2665,2665 ; v2(3445,2745) 3365,2665 2665,2665
+9V: F1.1 J1.1 | length 1080
  Top Layer w10: F1.1 1760,4090 1844.88,4005.12 1844.88,3997.24 1887.13,3955 2219.57,3955 J1.1@2240.16,3934.41
BOOT0: R5.1 SW2.1 U4.44 | length 176.4
  Top Layer w10: U4.44@3421.81,3481.18 R5.1@3421.81,3600 ; R5.1 R5.1@3421.81,3600 ; SW2.1 3421.81,3649.88 R5.1@3421.81,3600
BUTTON_1: R8.1 SW3.1 U4.25 | length 792.6
  Top Layer w10: U4.25 3787.2,3197.2 3950,3360 4333.07,3360 SW3.1
BUTTON_2: R9.1 SW4.1 U4.26 | length 872.5
  Top Layer w10: U4.26@3642.38,3217.67 3641.94,3217.24 3618.02,3217.24 U4.26 3741.89,3216.89 3975,3450 4341.93,3450 SW4.1 ; SW4.1@4345,3445 SW4.1@4367.35,3445
BUZZER: R6.2 U4.18 | length 151.5
  Top Layer w10: U4.18 3441.5,2996.77 3447.28,2990.98 R6.2@3447.28,2990
DHT11_DATA: *.2 R12.2 U4.11 | length 541
  Top Layer w10: *.2@3202.91,2742.09 *.2 3185,3015 3185,3146.58 3254.96,3216.54 3284.65,3216.54 U4.11
GND: *.3 BT1.1 C1.2 C2.1 C3.2 C4.1 C5.1 C6.1 C7.1 C8.1 C9.1 C10.1 C11.1 C12.1 C13.1 C14.1 C15.1 C16.1 C17.1 C18.1 C19.1 C20.1 D1.2 D2.1 J1.2 P1.4 Q1.3 R10.1 R11.1 SW1.2 SW2.2 SW3.2 SW4.2 U1.3 U1.5 U1.6 U2.1 U4.8 U4.23 U4.35 U4.47 U34.8 U35.4 U76.2 U77.4 | length 14180.7
  Top Layer w10: C1.2@1930,4473.86 1999.05,4473.86 2051.66,4526.46 2052.57,4526.46 D1.2 2075,4625.6 C2.1 ; U76.2 1905,3140 1905,3398.46 1992.13,3485.59 J1.2 2007.87,3485.59 2142.28,3620 2460,3620 2620.31,3780.31 C14.1@2662.68,3780.31 ; U1.3 2395,4217.99 2602.37,4425.36 ; U1.6 2395,4546.34 2515.98,4425.36 2602.37,4425.36 ; U1.5 2528.86,4103.82 U1.5@2529.84,4102.83 ; v1(2529.84,3855.7) U1.5@2529.84,4102.83 ; C17.1 2614.02,3337.72 2533.46,3418.27 2533.46,3431.18 2522.72,3441.93 SW1.2 2505,3622.64 C14.1@2662.68,3780.31 ; v1(2760,3430) 2760,3424.88 2832.91,3351.97 C13.1 ; R10.1 2790.98,2962.28 2988.27,2765 3080,2765 *.3 3145,2700 3321.93,2700 3457.13,2835.2 Q1.3 3472.87,2835.2 3511.06,2873.38 3511.06,3046.06 3540.27,3075.27 U4.23@3540.27,3119.57 ; D2.1 2801.02,4711.65 2801.02,4733.98 2788,4747 2707,4747 2680.24,4720.24 C4.1 2602.37,4425.36 ; C18.1 2918.54,3191.46 C19.1 2922.09,3195 v1(2990,3195) ; C12.1 C11.1 2978.6,4411.4 C9.1 3072.13,4410 3084.84,4422.72 U2.1 3114.65,4429.65 3133.27,4448.27 3133.27,4466.34 3291.93,4625 U34.8 ; C16.1 3002.91,4199.69 C6.1 ; v4(3142.35,3276.31) 3168.54,3276.31 3169.85,3275 3170,3275 3170.94,3275.94 U4.8 ; C8.1 C7.1 C6.1 ; C15.1 3203.54,3500.05 v1(3260,3556.5) ; U4.47 3362.76,3527.75 3385.01,3550 v1(3390,3550) ; BT1.1 3404.53,4032.4 3399.69,4027.56 3397.69,4027.56 3373,4002.88 3373,3956.12 3386.76,3942.37 3499.2,3942.37 3528.03,3913.54 C20.1 3531.97,3913.54 3556.37,3889.14 3557.04,3889.14 3564.65,3881.53 3564.65,3819.65 v1(3530,3785) 3529.04,3785.96 3425.96,3785.96 SW2.2 ; U4.35 3618.02,3394.4 3647.71,3394.4 3659.22,3405.91 3659.22,3594.22 v3@3660,3595 ; R11.1 4137.72,3255.98 4156.99,3275.26 4156.99,3297.35 v1(4160.81,3301.18) ; v1(4230,3225) 4233.83,3228.83 4335.76,3228.83 SW3.2 ; v1(4230,3585) 4230.96,3585.96 4344.04,3585.96 SW4.2 ; U1.5@2529.84,4102.83 2562.68,4070 2721.14,4070 C3.2 ; C14.1@2662.68,3780.31 2665.31,3780.31 C14.1 2681.97,3795 2730,3843.03 C3.2 ; C3.2 2735.91,4078.86 2863.65,4206.6 C5.1 C6.1
  Bottom Layer w10: U76.2 2285,2760 U35.4 2435,2825 3020,2825 *.3 ; 2525,3840 2525,3665 2633.5,3556.5 ; v1(2760,3430) 2633.5,3556.5 ; v1(2990,3195) 3070.84,3275.84 ; v4(3142.35,3276.31) 3141.88,3275.84 3070.84,3275.84 ; v1(3390,3550) 3386.75,3553.25 3263.25,3553.25 v1(3260,3556.5) ; v1@3535,3790 3711,3614 P1.4 ; v3(3661.61,3602.59) 3663.52,3604.5 3750.5,3604.5 P1.4 ; U77.4 4120,3695 v1(4230,3585) ; v1(4160.81,3301.18) 4160.81,3297.68 v1@4230,3228.5 ; v1(4230,3225) v1@4230,3228.5 ; 2633.5,3556.5 v1(3260,3556.5) ; 3070.84,3275.84 3260,3465 v1(3260,3556.5) ; P1.4 3779.88,3614 3808.88,3585 v1(4230,3585) ; v1@4230,3228.5 v1(4230,3585)
HC05_RX: U4.30 U77.2 | length 1073.5
  Top Layer w10: U4.30 3725.63,3295.63 4320,3890 U77.2
HC05_TX: U4.31 U77.3 | length 966.6
  Top Layer w10: U4.31 3618.02,3315.66 3641.94,3315.66 3642.38,3316.09 3648.15,3316.09 4220,3887.95 U77.3
HSE_IN: C13.2 U4.5 Y1.1 | length 598.4
  Top Layer w10: Y1.1 2840,3405.47 2853.8,3391.67 2867.6,3377.87 2867.6,3374.37 2890,3351.97 C13.2 2890,3349.06 2904.69,3334.37 2904.69,3335 U4.5
HSE_OUT: C14.2 U4.6 Y1.2 | length 1220.3
  Top Layer w10: Y1.2 2840,3830.12 2762.48,3752.6 2694.69,3752.6 C14.2 2680,3443.19 2808.51,3314.68 2809.13,3315.31 U4.6
LED_RED: DS1.1 U4.29 | length 350.4
  Top Layer w10: U4.29 3679.06,3275.94 v1@3685,3270 ; v1(3925,3260) 3969.41,3260 3972.28,3257.13 DS1.1
  Bottom Layer w10: v1(3695,3260) v1(3925,3260)
LSE_IN: C15.2 U4.3 Y2.1 | length 365.6
  Top Layer w10: 3090,3573.98 Y2.1@3110,3593.98 ; Y2.1 3146.46,3584.53 C15.2 3161.14,3410.31 3161.14,3407.68 3194.45,3374.37 U4.3 U4.3@3284.65,3374.72
LSE_OUT: C16.2 U4.4 Y2.2 | length 831.3
  Top Layer w10: Y2.2 3135,3901.1 3060,3826.1 C16.2 3060,3423.03 3128.35,3354.68 U4.4
MQ2_AO: R7.1 R10.2 U4.10 | length 722.3
  Top Layer w10: R7.1@2658.6,3005 2851.74,3005 3083.32,3236.57 U4.10
NetBT1_2: BT1.2 D5.1 | length 263.9
  Top Layer w10: D5.1 3301,3809.5 3314,3822.49 3314,3828.5 3340.47,3854.97 BT1.2@3340.47,4051.02
NetC1_1: C1.1 C2.2 F1.2 U1.1 | length 978.2
  Top Layer w10: C1.1@1911.93,4708.07 C1.1 ; C2.2 C2.2@2077.4,4700
  Top Layer w15: C2.2@2077.4,4700 2145,4700 2205,4640 2205,4217.05 U1.1
  Top Layer w20: F1.2 C1.1@1916.93,4719.21 ; C1.1@1930,4706.14 C2.2@2076,4706.14
NetD1_1: D1.1 L1.1 U1.2 | length 723.8
  Top Layer w10: D1.1 2075,4245 L1.1 2065,4160 2154.88,4070.12 2294.37,4070.12 2328.07,4103.82 U1.2
  Bottom Layer w10: L1.1 L1.1@2085,4215
NetD2_2: D2.2 R1.1 | length 91.5
  Top Layer w10: R1.1@2735,4603.46 D2.2
NetD3_1: D3.1 LS1.2 Q1.2 | length 301.3
  Top Layer w10: Q1.2 3800,2872.6 LS1.2
NetDS1_2: DS1.2 R11.2 | length 94.6
  Top Layer w10: DS1.2 R11.2
NetQ1_1: Q1.1 R6.1 | length 86.4
  Top Layer w10: Q1.1 3465.31,2910 3480,2924.69 R6.1
NetR7_2: R7.2 U35.2 | length 283.7
  Top Layer w10: U35.2@2588.54,2741.46 2575,2755 2575,2952.72 R7.2
NRST: C17.2 R4.1 SW1.1 U4.7 | length 779.4
  Top Layer w10: SW1.1@2510,3300 2512.72,3302.72 C17.2@2615,3302.72 ; C17.2 2619.84,3297.44 2626.53,3297.44 2626.68,3297.28 R4.1 2666.31,3295.98 3149.65,3295.98 3150,3295.63 U4.7 U4.7@3284.65,3295.98
SCL_LCD: R2.1 U4.42 U34.14 | length 1639.7
  Top Layer w10: U4.42 3461.18,3525.77 3475,3539.59 v1(3475,3545) ; R2.1 v1(4360,4495)
  Bottom Layer w10: v1(3475,3545) 3475,3950 3785,4260 v1(4000,4260) 4003.83,4263.83 4018.83,4263.83 4084.67,4329.67 4124.53,4329.67 4289.86,4495 v1(4360,4495)
SDA_LCD: R3.1 U4.43 U34.15 | length 1757.6
  Top Layer w10: U4.43 3441.5,3578.88 3590,3727.39 3590,4195 3625,4230 4095,4230 4180,4315 U34.15 4180,4425 4315,4560 4347.28,4560
SWCLK_PRG: P1.2 U4.37 | length 427.1
  Top Layer w10: U4.37 3559.61,3617.61 3755,3813 P1.2
SWDIO_PRG: P1.3 U4.34 | length 423.3
  Top Layer w10: U4.34 3618.02,3374.72 3653.48,3374.72 3696.09,3417.33 3696.09,3656.09 3755,3715 P1.3
UART2_RX: U4.39 U76.4 | length 1759.2
  Top Layer w10: v1(3520,3535) 3520.12,3534.88 3520.12,3471.93 U4.39
  Bottom Layer w10: U76.4 2093,3152 3044.2,3152 3411.2,3519 3498.59,3519 3514.59,3535 v1(3520,3535)
UART2_TX: U4.20 U76.3 | length 1557.9
  Top Layer w10: U4.20 3481.21,3138.79 3481.21,3072.66 v1(3481.69,3072.18)
  Bottom Layer w10: U76.3 2072.82,3072.18 v1(3481.69,3072.18)
VBAT: C20.2 D4.2 D5.2 U4.1 | length 614.5
  Top Layer w10: U4.1 3285,3670.5 D5.2 3295,3741.5 3404,3850.5 D4.2 3524.04,3850.5 C20.2
VDDA: C18.2 C19.2 FB1.1 U4.9 | length 553.9
  Top Layer w10: FB1.1@2735,3257.51 2738.12,3260.63 C19.2@2920,3260.63 ; C19.2 2926.26,3256.26 U4.9
pads on no net: J1. J1.3 SW1.H1 SW2.H1 SW3.H1 SW4.H1 U2.4 U4.2 U4.12 U4.13 U4.14 U4.15 U4.16 U4.17 U4.19 U4.21 U4.22 U4.27 U4.28 U4.32 U4.33 U4.38 U4.40 U4.41 U4.45 U4.46 U34.4 U34.5 U34.6 U34.7 U34.9 U34.10 U34.11 U34.12 U34.13 U35.3 U77.1 U77.6

## Polygon pours and split planes (outlines as drawn)
GND on Top Layer "GND_L01_P000" (solid, pour order 0): 1659.98,2550 1659.98,4765 cw(c1665,4765) 1665,4770.02 4525,4770.02 cw(c4525,4765) 4530.02,4765 cw(c4525,4765) 4525.02,4759.98 4525.02,2550 cw(c4520,2550) 4520,2544.99 1665,2544.99 cw(c1665,2550)
GND on Bottom Layer "GND_L02_P001" (solid, pour order 1): 1659.98,2550 1659.98,4765 cw(c1665,4765) 1665,4770.02 4525,4770.02 cw(c4525,4765) 4530.02,4765 cw(c4525,4765) 4525.02,4759.98 4525.02,2550 cw(c4520,2550) 4520,2544.99 1665,2544.99 cw(c1665,2550)

## Keep-outs
Keep-Out Layer:
  lines w10: 4520,4760 4520,2550 1665,2550 1665,4765 1750,4765 4525,4765

## Silkscreen, mask and mechanical layers (free items; w line width, h text height)
Top Overlay:
  drawing of 9 lines, arcs and shapes, not listed
  text "Embedded System Design" at 2030,2665 h30
  text "Environment_Station-PCB by AnPhamm-Schem by Vin" at 1705,2604.99 h60

## Text inside footprints (layer, text, board x,y; h text height)
D2: Top Overlay "+" at 2661.34,4706 h30 r270